# EAGLE board PIR (EAGLE 6.3)
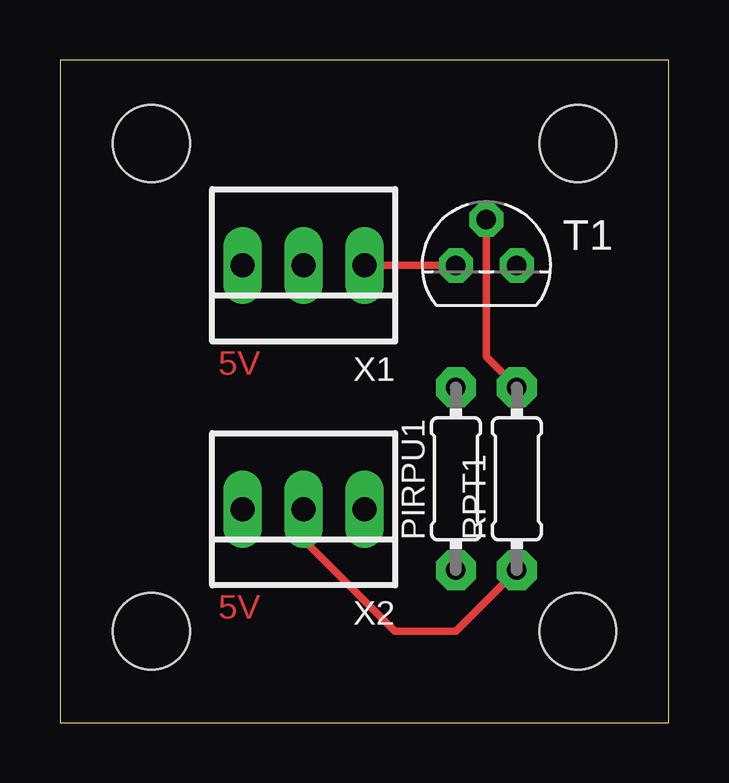
[diagram p0: board, top side]
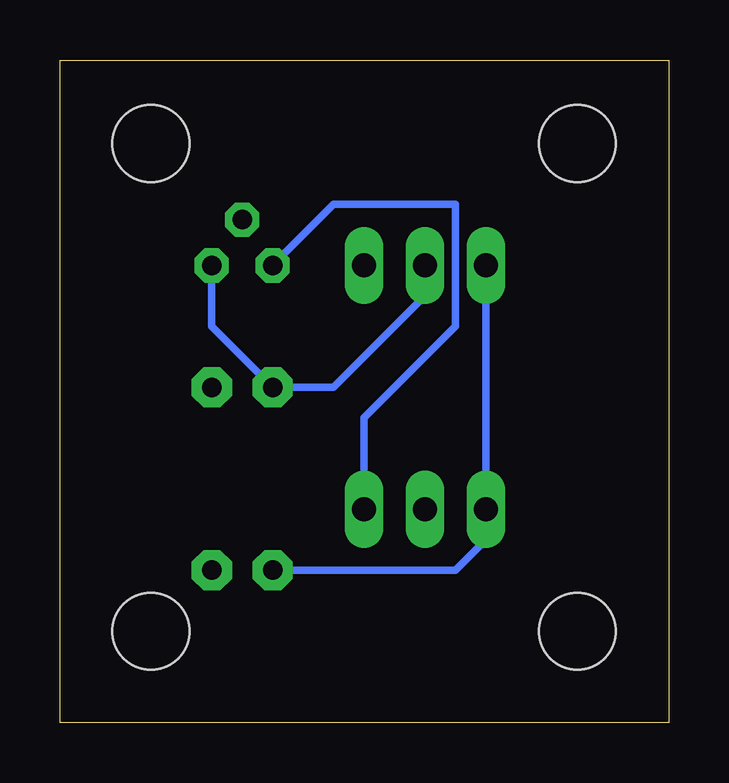
[diagram p1: board, bottom side, seen from below]

Size 25.38 x 27.61 mm. Coordinates in mm from the lower left corner, seen from the top.
Outline: 0,0 25.38,0 25.38,27.61 0,27.61 0,0
Copper layers (1*16): Top 0.035mm / dielectric 1.5mm / Bottom 0.035mm
Design rules "CUSTOM": minimum track width 12mil, minimum drill 20mil, track to track 12mil, track to pad 12mil, pad to pad 12mil, via to via 8mil, smd to smd 8mil, copper to edge 12mil, drill to drill 12mil, minimum pad ring 12mil, minimum via ring 12mil, stop-mask expansion 4mil, vias tented up to drill 25mil, thermal gap 10mil
Net classes: 0 default: width 0.254 mm, clearance 0.254 mm
Holes 3.2 mm at 21.59,3.81 3.81,3.81 21.59,24.13 3.81,24.13

## Footprints (pad centres in the part's own frame; a part is rotated, then mirrored left to right if it is on the bottom)
0204/7 = drill 0.813 pad 1.676 octagon: 1 -3.81,0; 2 3.81,0
TO92 = drill 0.813 octagon: 1 1.27,0; 2 0,1.905; 3 -1.27,0
22-23-2031 = drill 1 long: 1 -2.54,0; 2 0,0; 3 2.54,0

## Placement (x,y rotation side)
PIRPU1  10K  [0204/7]  16.51,10.16 90 top
RPT1  4K7  [0204/7]  19.05,10.16 90 top
T1  2N3904  [TO92]  17.78,19.05 0 top
X1  SIGNAL  [22-23-2031]  10.16,19.05 180 top
X2  PIR  [22-23-2031]  10.16,8.89 180 top

## Library data of the parts
PIRPU1 RPT1 = adafruit
T1 = transistor-neu-to92
X1 X2 = con-molex; MF: MOLEX; MPN: 22-23-2031; OC_FARNELL: 1462950; OC_NEWARK: 30C0862

## Nets
+5V: PIRPU1.1 X1.3 X2.3
GND: T1.3 X1.1 X2.1
N$10: RPT1.1 X2.2
N$12: RPT1.2 T1.2
SIG: PIRPU1.2 T1.1 X1.2

## Tracks (layer width: path | path; a pad name or v marks a point on that pad's centre or on a via)
+5V
  Bottom 0.305: X1.3 X2.3 7.62,7.62 8.89,6.35 PIRPU1.1
GND
  Top 0.305: X1.1 T1.3
  Bottom 0.305: X2.1 12.7,12.7 8.89,16.51 8.89,21.59 13.97,21.59 T1.3
N$10
  Top 0.305: X2.2 10.16,7.62 13.97,3.81 16.51,3.81 RPT1.1
N$12
  Top 0.305: T1.2 17.78,15.24 RPT1.2
SIG
  Bottom 0.305: T1.1 19.05,16.51 PIRPU1.2 13.97,13.97 10.16,17.78 X1.2

## Text on the board
Top: 5V | 5V